# Altium PCB PCB1.PcbDoc
Units mm, origin at the board's own origin, x right, y up, seen from the top; angles counter-clockwise.
Board outline 60 x 50 mm, 2 copper layers (Top Layer, Bottom Layer); 26 components, 10 nets, 126 pads, 76 vias.
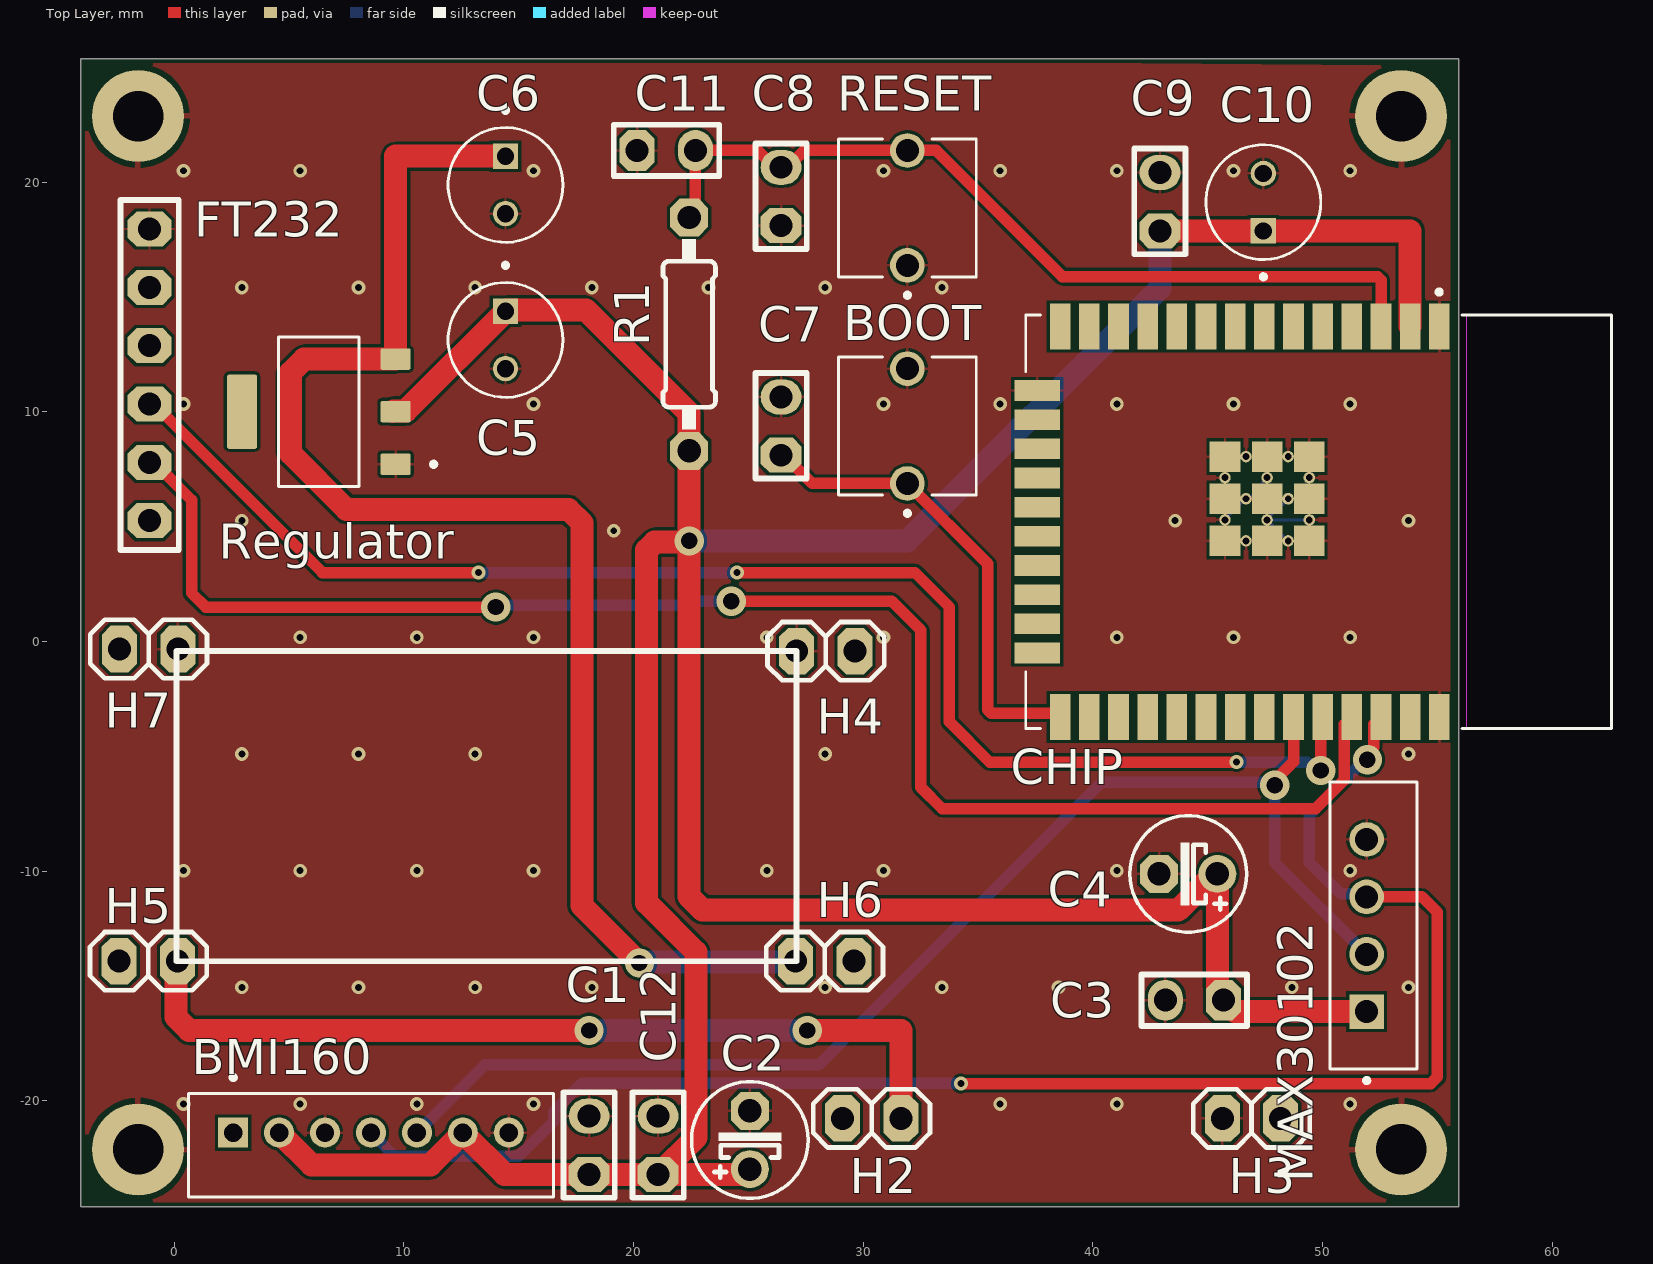
[diagram p0: Top Layer view]
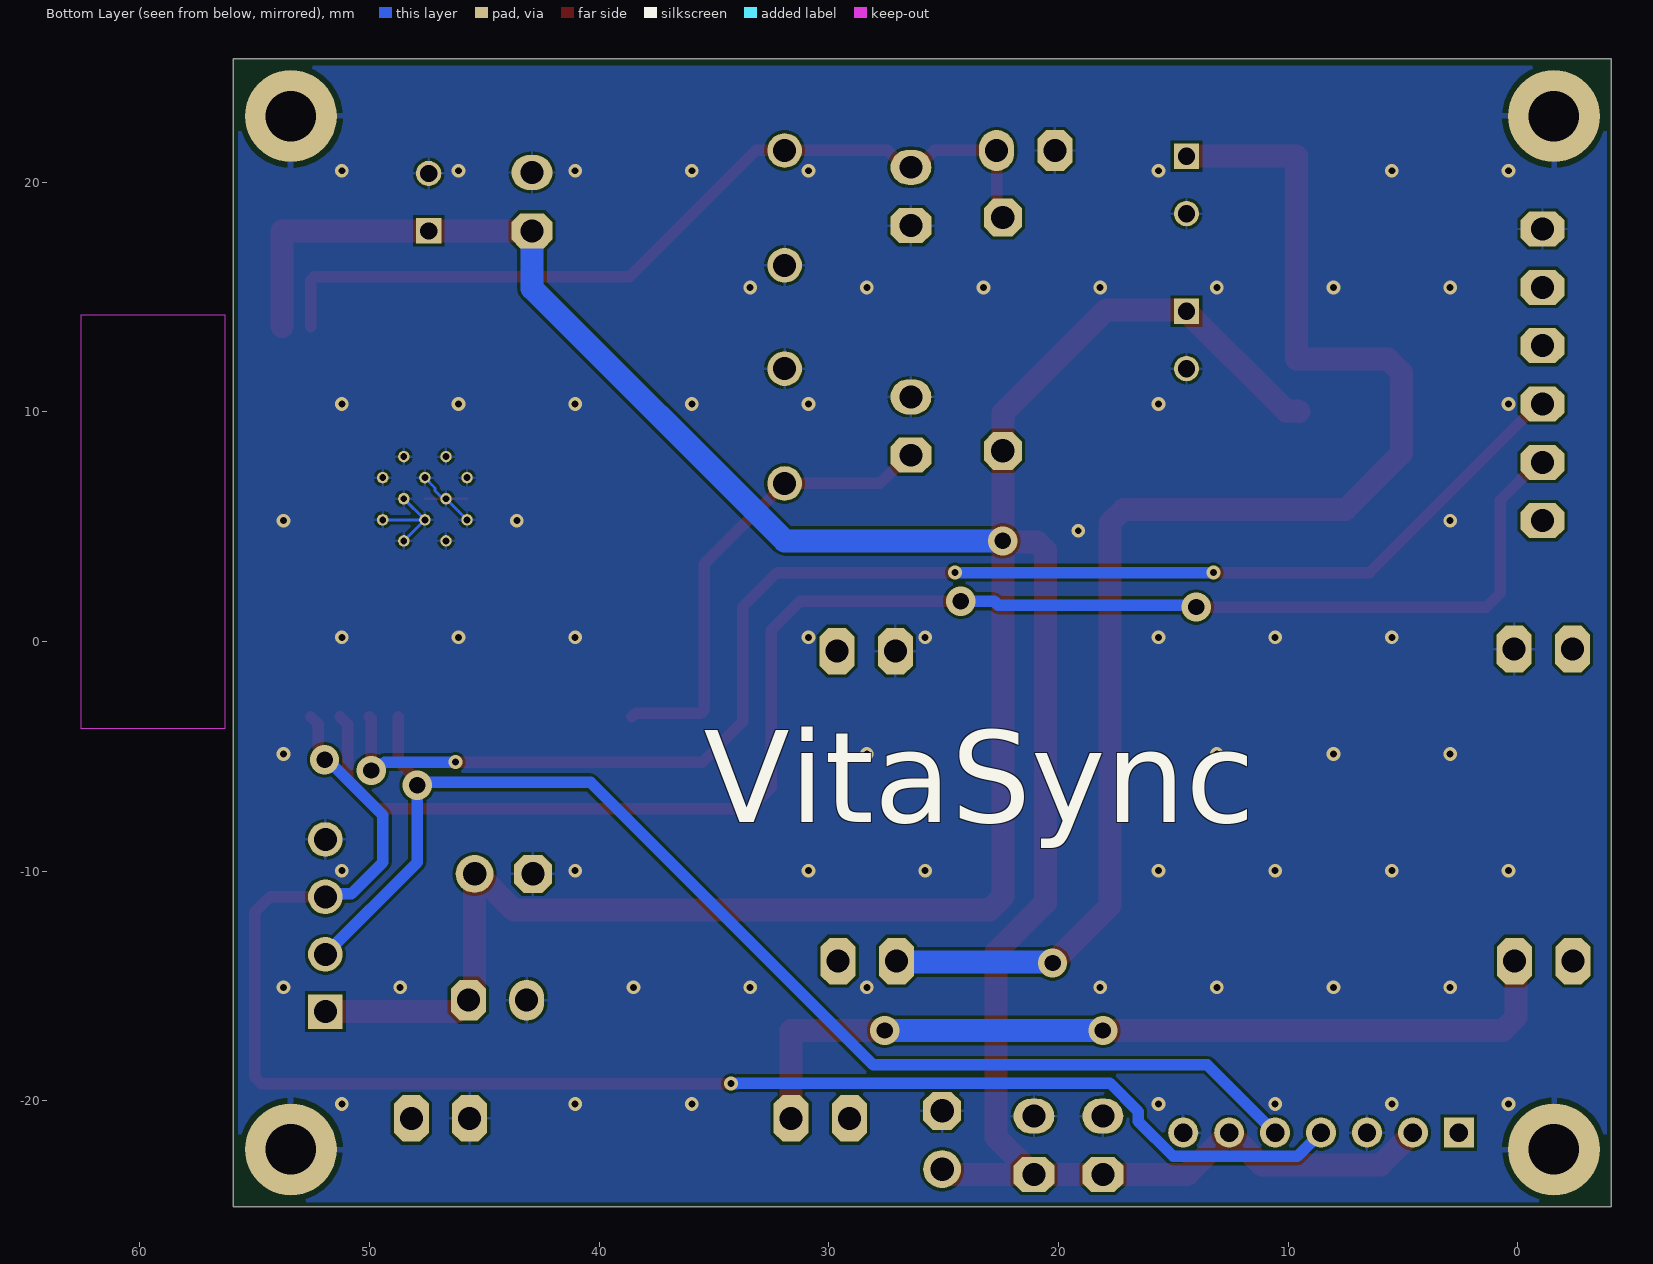
[diagram p1: Bottom Layer view, seen from below]
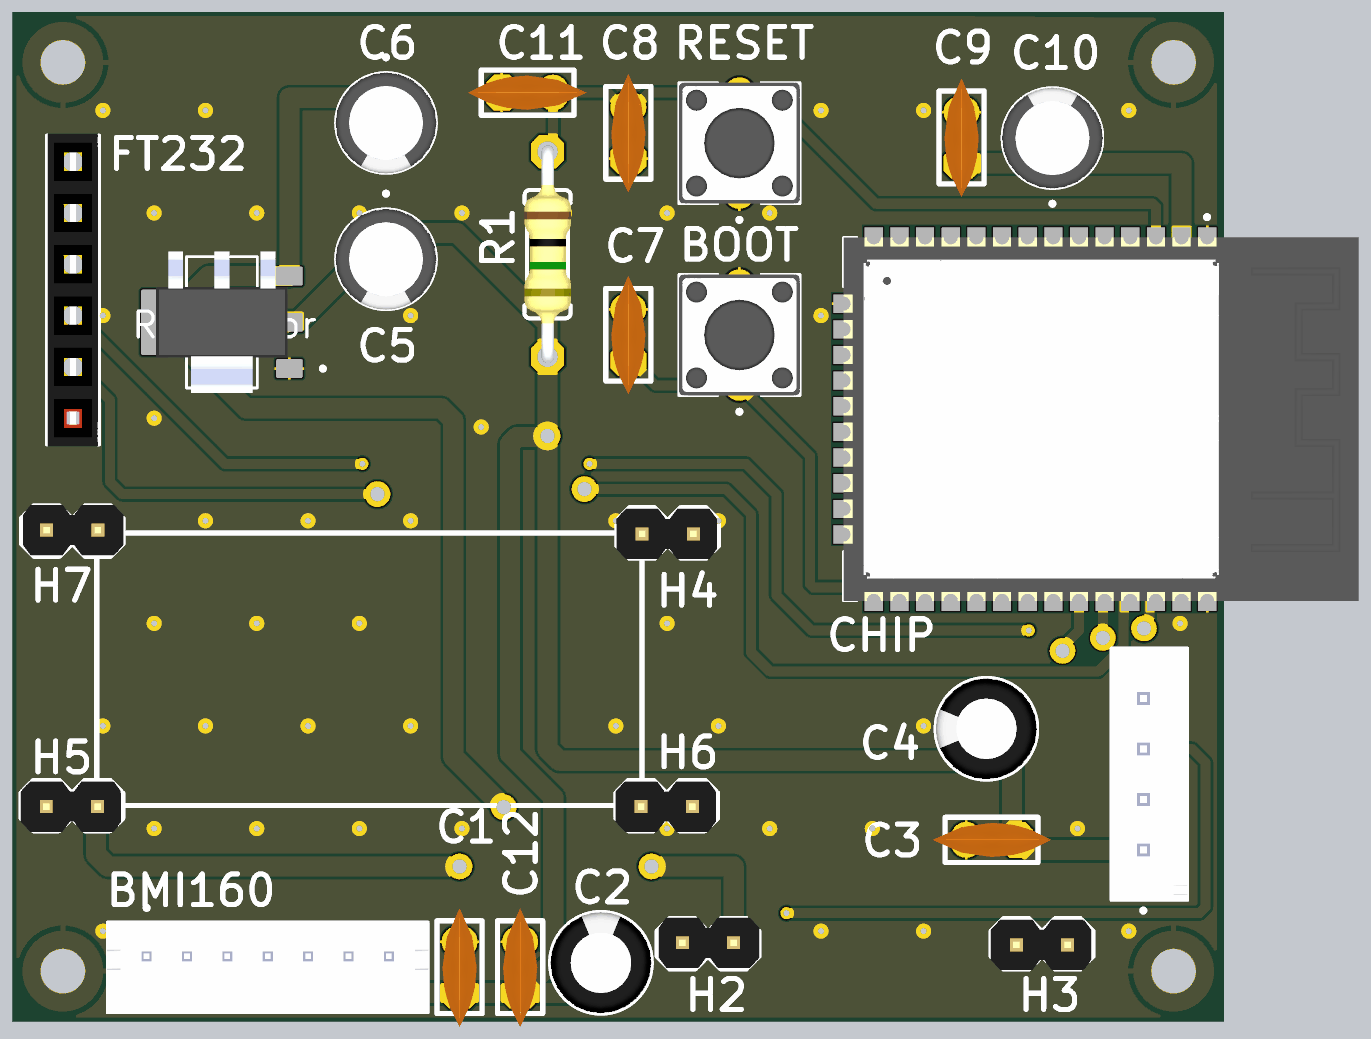
[diagram p2: 3D render of the assembled board from above, using the file's embedded part models]

## Layer stack, top to bottom
Top Solder: solder mask 0.0102, Solder Resist, Dk 3.5
Top Layer: signal copper 0.0356
Dielectric 1: dielectric 0.32, FR-4, Dk 4.8
Bottom Layer: signal copper 0.0356
Bottom Solder: solder mask 0.0102, Solder Resist, Dk 3.5

## Board outline
-4.08,-24.619 55.92,-24.619 55.92,25.381 -4.08,25.381

## Design rules (kind name [scope] priority, off if disabled: settings)
BoardOutlineClearance [All] p1: gap=0.2 ignorepadtopadclearanceinfootprint=FALSE
Clearance [All] p1: gap=0.127 ignorepadtopadclearanceinfootprint=FALSE except(0.25: Arc-Hole Track-Hole SMDPad-Hole THPad-Hole Via-Hole Fill-Hole Poly-Hole Region-Hole Text-Hole)
ComponentClearance [All] p1: gap=0.127 collisioncheckmode=3 verticalgap=0.127 showdistances=TRUE
DiffPairsRouting [All] p1: maxlimit=0.254 minlimit=0.127 mostfreqgap=0.127 toplayer_minwidth=0.127 toplayer_maxwidth=25.4 toplayer_prefwidth=0.127 bottomlayer_minwidth=0.127 bottomlayer_maxwidth=25.4 bottomlayer_prefwidth=0.127 maxuncoupledlength=12.7
Height [All] p1: minheight=0 maxheight=1816.048 prefheight=12.7
HoleSize [All] p1: absolutevalues=TRUE maxlimit=6.3 minlimit=0.3 maxpercent=80.000 minpercent=20.000
HoleToHoleClearance [All] p1: gap=0.25 allowstackedmicrovias=FALSE
MinimumAnnularRing [All] p1: minimumring=0.076
MinimumSolderMaskSliver [All] p1: minsoldermaskwidth=0
PlaneClearance [All] p1: clearance=0.127
PlaneConnect PlaneConnectPowerPads [InPadClass('PowerPads')] p1: planeconnectstyle=Direct reliefexpansion=0.508 reliefentries=4 reliefconductorwidth=0.254 reliefairgap=0.254
PlaneConnect [All] p2: pad.planeconnectstyle=Relief pad.reliefexpansion=0.3 pad.reliefentries=4 pad.reliefconductorwidth=0.127 pad.reliefairgap=0.127 via.planeconnectstyle=Direct via.reliefexpansion=0.3 via.reliefentries=4 via.reliefconductorwidth=0.127 via.reliefairgap=0.127
PolygonConnect PolygonConnectPowerPads [All vs (InPadClass('PowerPads'))] p1: connectstyle=Direct reliefconductorwidth=0.254 reliefentries=4 polygonreliefangle="90 Angle" airgapwidth=0.254
PolygonConnect [All] p2: thpad.connectstyle=Relief thpad.reliefconductorwidth=0.127 thpad.reliefentries=4 thpad.polygonreliefangle="90 Angle" thpad.airgapwidth=0.127 smdpad.connectstyle=Relief smdpad.reliefconductorwidth=0.127 smdpad.reliefentries=4 smdpad.polygonreliefangle="90 Angle" smdpad.airgapwidth=0.127 via.connectstyle=Direct via.reliefconductorwidth=0.127 via.reliefentries=4 via.polygonreliefangle="90 Angle" via.airgapwidth=0.127
RoutingVias [All] p1: holewidth=0.3 width=0.6 viastyle="Through Hole" minholewidth=0.3 minwidth=0.6 maxholewidth=0.6 maxwidth=6.6
SilkToSilkClearance [All] p1: silktosilkclearance=0
SilkToSolderMaskClearance [IsPad] p1: minsilkscreentomaskgap=0.127 clearancetoexposedcopper=TRUE
SolderMaskExpansion [All] p1: expansion=0.075 istentingtop=FALSE
Width [All] p1: maxlimit=25.4 minlimit=0.127 preferedwidth=0.127 minimp=50.000000 maximp=50.000000 favimp=50.000000
20 further rules are at their usual default settings.

## Components (designator, comment, footprint, x,y, rotation, side; value= is the part's Value field where it differs from the comment)
BMI160 "JST_7" JST_7 8.563,-21.936 r180 top
BOOT "" SW_BUTT-2 31.92,9.381 r90 top
C1 "Ceramic Capacitor" "Ceramic Capacitor" 18.063,-21.936 r90 top
C2 "Capacitor 10uF" "Capacitor 10uF" 24.892,-21.866 r90 top
C3 "Ceramic Capacitor" "Ceramic Capacitor" 44.42,-15.619 r180 top
C4 "Capacitor 10uF" "Capacitor 10uF" 44.31,-10.291 r180 top
C5 "EEUHD1H220" CAPPRD250W50D500H1100 14.42,13.131 r270 top
C6 "EEUHD1H220" CAPPRD250W50D500H1100 14.42,19.881 r270 top
C7 "Ceramic Capacitor" "Ceramic Capacitor" 26.42,9.381 r90 top
C8 "Ceramic Capacitor" "Ceramic Capacitor" 26.42,19.381 r90 top
C9 "Ceramic Capacitor" "Ceramic Capacitor" 42.92,19.151 r90 top
C10 "EEUHD1H220" CAPPRD250W50D500H1100 47.42,19.131 r90 top
C11 "Ceramic Capacitor" "Ceramic Capacitor" 21.42,21.381 r0 top
C12 "Ceramic Capacitor" "Ceramic Capacitor" 21.063,-21.936 r90 top
CHIP "ESP32 Wroom 32D" "ESP32 Wroom 32D" 48.428,5.47 r270 top
FT232 "FEMALE_HEADER_6" FEMALE_HEADER_6 -1.08,11.611 r90 top
H2 "Header_2" HEADER_2 30.483,-20.936 r180 top
H3 "Header_2" HEADER_2 46.787,-20.594 r0 top
H4 "Header_2" HEADER_2 28.25,-0.25 r0 top
H5 "Header_2" HEADER_2 -1.25,-13.75 r0 top
H6 "Header_2" HEADER_2 28.2,-13.75 r0 top
H7 "Header_2" HEADER_2 -1,-0.5 r180 top
MAX30102 "JST_4" JST_4 51.92,-12.369 r90 top
R1 "resistor" Resistor 22.42,13.381 r270 top
Regulator "ASM1117" ASM1117 6.42,9.881 r180 top
RESET "BUTT-2" SW_BUTT-2 31.92,18.881 r90 top

## Footprints (in the part's own frame and the unit in brackets; to place one, negate y for a bottom-side part, rotate by r counter-clockwise, add the part's x,y. Pads: shape width x height; smd on the part's side, far side on the other; paste and mask are expansions set on the pad)
ASM1117 [mm]
  rrect15% 1.31x0.93 smd: 1(-3.218,2.163) 2(-3.218,-0.127) 3(-3.218,-2.417)
  rrect15% 1.31x3.24 smd: 4(3.472,-0.127)
  silkscreen extent -4.97,-3.38 1.88,3.13, body extent -3.12,-3.63 3.38,3.37, height 1.8
"Capacitor 10uF" [mil]
  round 65 hole 40: +(-43.7,-6.73)
  oct 65x65 hole 40: -(56.3,-6.73)
  silkscreen extent -94,-107 106,93, body extent -92,-105 104,92, height 395
CAPPRD250W50D500H1100 [mm]
  round 1.1 hole 0.75: N(1.25,0)
  rect 1.1x1.1 hole 0.75: P(-1.25,0)
  silkscreen extent -3.35,-2.5 2.5,2.5, body extent -2.5,-2.5 2.5,2.5, height 11
"Ceramic Capacitor" [mil]
  oct 60x70 hole 39.37: 1(-50,0)
  oval 60x70 hole 39.37: 2(50,0)
  silkscreen extent -90,-44 91,44, body extent -115,-33 115,33, height 245
"ESP32 Wroom 32D" [mm]
  rect 2x0.9 smd: 1(-8.246,6.657) 2(-8.246,5.387) 3(-8.246,4.117) 4(-8.246,2.847) 5(-8.246,1.577) 6(-8.246,0.307) 7(-8.246,-0.963) 8(-8.246,-2.233) 9(-8.246,-3.503) 10(-8.246,-4.773) 11(-8.246,-6.043) 12(-8.246,-7.313) 13(-8.246,-8.583) 14(-8.246,-9.853) 25(8.754,-9.853) 26(8.754,-8.583) 27(8.754,-7.313) 28(8.754,-6.043) 29(8.754,-4.773) 30(8.754,-3.503) 31(8.754,-2.233) 32(8.754,-0.963) 33(8.754,0.307) 34(8.754,1.577) 35(8.754,2.847) 36(8.754,4.117) 37(8.754,5.387) 38(8.754,6.657)
  rect 0.9x2 smd: 15(-5.461,-10.853) 16(-4.191,-10.853) 17(-2.921,-10.853) 18(-1.651,-10.853) 19(-0.381,-10.853) 20(0.889,-10.853) 21(2.159,-10.853) 22(3.429,-10.853) 23(4.699,-10.853) 24(5.969,-10.853)
  rect 1.33x1.33 smd: 39_1(-2.581,0.992) 39_2(-0.746,0.992) 39_3(1.089,0.992) 39_4(-2.581,-0.843) 39_5(-0.746,-0.843) 39_6(1.089,-0.843) 39_7(-2.581,-2.678) 39_8(-0.746,-2.678) 39_9(1.089,-2.678)
  round 0.5 hole 0.3: 39_10(-1.663,0.992) 39_11(0.172,0.992) 39_12(-2.581,0.075) 39_13(-0.746,0.075) 39_14(1.089,0.075) 39_15(-1.663,-0.843) 39_16(0.172,-0.843) 39_17(-2.581,-1.76) 39_18(-0.746,-1.76) 39_19(1.089,-1.76) 39_20(-1.663,-2.678) 39_21(0.172,-2.678)
  Keep-Out Layer region: 9.254,7.847 -8.746,7.847 -8.746,14.147 9.254,14.147
  silkscreen extent -9.85,-11.35 9.25,14.15, body extent -8.75,-11.35 9.25,14.15, height 3.25
FEMALE_HEADER_6 [mm]
  oct 1.524x1.905 hole 1: 1(-6.35,0) 2(-3.81,0) 3(-1.27,0) 4(1.27,0) 5(3.81,0) 6(6.35,0)
  silkscreen extent -7.62,-1.27 7.62,1.27, body extent -7.74,-1.25 7.75,1.25, height 8.5
HEADER_2 [mil]
  oct 60x80 hole 39.37: 1(-45.35,-6.73) 2(54.65,-6.73)
  silkscreen extent -95,-57 105,43, body extent -95,-58 101,40, height 323
JST_4 [mm]
  rect 1.508x1.508 / inner round 1.508 / far side rect 1.508x1.508 hole 1: 1(-3.75,0)
  round 1.508 hole 1: 2(-1.25,0) 3(1.25,0) 4(3.75,0)
  silkscreen extent -6.85,-2.2 6.25,1.6, body extent -6.25,-2.2 6.25,1.6, height 6
JST_7 [mm]
  rect 1.308x1.308 / inner round 1.308 / far side rect 1.308x1.308 hole 0.8: 1(6,-0.55)
  round 1.308 hole 0.8: 2(4,-0.55) 3(2,-0.55) 4(0,-0.55) 5(-2,-0.55) 6(-4,-0.55) 7(-6,-0.55)
  silkscreen extent -7.95,-3.05 7.95,2.25, body extent -7.95,-2.25 7.95,2.25, height 6
Resistor [mil] "10K, 0.25 W"
  oct 65x65 hole 40: 1(-200,0) 2(200,0)
  silkscreen extent -163,-45 163,45, body extent -212,-45 212,46, height 96
SW_BUTT-2 [mm]
  round 1.508 hole 1 mask+0.102: 1(-2.5,0) 2(2.5,0)
  silkscreen extent -3.9,-3 3,3, body extent -3,-3 3,3, height 5.1

## Part data
BOOT: library part BUTT-2, "Tactile Switches MINI PUSH BUTTON SWITCH 2-PIN QTY. 4", Package=None, Check_prices=https://www.snapeda.com/parts/BUTT-2/Gravitech/view-part/?ref=eda, MF=Gravitech, MP=BUTT-2, SnapEDA_Link=https://www.snapeda.com/parts/BUTT-2/Gravitech/view-part/?ref=snap
C5 C6 C10: "Cap Aluminum Lytic 22uF 50V 20% (5 X 11mm) Radial 2.5mm 65mA 1000h 105C Bulk", Package="RADIAL-2 Panasonic", Availability="In Stock", Check_prices=https://www.snapeda.com/parts/EEU-HD1H220/Panasonic/view-part/?ref=eda, MF=Panasonic, MP=EEU-HD1H220, Price=None, Purchase-URL=https://pricing.snapeda.com/search/part/EEU-HD1H220/?ref=eda, SnapEDA_Link=https://www.snapeda.com/parts/EEU-HD1H220/Panasonic/view-part/?ref=snap
C12: "10uF"
R1: "10k,0.25W"
RESET: "Tactile Switches MINI PUSH BUTTON SWITCH 2-PIN QTY. 4", Package=None, Check_prices=https://www.snapeda.com/parts/BUTT-2/Gravitech/view-part/?ref=eda, MF=Gravitech, MP=BUTT-2, SnapEDA_Link=https://www.snapeda.com/parts/BUTT-2/Gravitech/view-part/?ref=snap

## Free pads (board coordinates)
  round 4 hole 2.2 paste-2539.97 mask+0.102: MH1(-1.58,-22.119) MH2(53.42,-22.119) MH4(53.42,22.881) MH5(-1.58,22.881)

## Via types
v1: diameter 0.6, hole 0.3, Top Layer to Bottom Layer, 67 vias
v2: diameter 1.27, hole 0.711, Top Layer to Bottom Layer, 9 vias

## Nets (pads, with @x,y where several pads share a name; then routed paths per layer and width w, separated by ;. In a path a pad name is that pad's centre, name@x,y a point inside that pad or via, vN(x,y) a via of type N, cw(c..) or ccw(c..) an arc to the next point about the centre after c; other vN are vias at no path point)
+4.7: H2.1 H5.2 | length 38.1
  Top Layer w1: H5.2@0.063,-13.936 0.063,-16.351 0.649,-16.936 v2(18.063,-16.936) ; v2(27.563,-16.936) 31.635,-16.936 H2.1
  Bottom Layer w1: v2(18.063,-16.936) v2(27.563,-16.936)
+5: C6.P H6.1 Regulator.3 | length 62.9
  Top Layer w1: C6.P 9.638,21.131 Regulator.3 5.649,12.298 5.063,11.712 5.063,8.187 7.5,5.75 17.164,5.75 17.75,5.164 17.75,-11.5 v2(20.25,-14)
  Bottom Layer w1: v2(20.25,-14) 20.289,-13.961 27.039,-13.961 H6.1@27.063,-13.936
EN: C8.2 C11.2 CHIP.3 R1.1 RESET.2 | length 37.8
  Top Layer w0.5: R1.1 22.69,18.731 C11.2 25.407,21.381 26.137,20.651 C8.2 26.704,20.651 27.434,21.381 RESET.2 33.175,21.381 38.675,15.881 52.397,15.881 52.545,15.732 CHIP.3
GND: BMI160.3 BMI160.7 BOOT.2 C1.2 C2.- C3.2 C4.- C5.N C6.N C7.2 C8.1 C9.2 C10.N C11.1 C12.2 CHIP.1 CHIP.15 CHIP.38 CHIP.39_1 CHIP.39_2 CHIP.39_3 CHIP.39_4 CHIP.39_5 CHIP.39_6 CHIP.39_7 CHIP.39_8 CHIP.39_9 CHIP.39_10 CHIP.39_11 CHIP.39_12 CHIP.39_13 CHIP.39_14 CHIP.39_15 CHIP.39_16 CHIP.39_17 CHIP.39_18 CHIP.39_19 CHIP.39_20 CHIP.39_21 FT232.6 H3.1 H4.1 H7.1 MAX30102.4 pad.MH1 pad.MH2 pad.MH4 pad.MH5 Regulator.1 RESET.1 | length 9
  Top Layer w0.127: CHIP.39_8 CHIP.39_5
  Bottom Layer w0.127: CHIP.39_21 CHIP.39_18 46.731,6.152 47.142,6.562 47.142,6.689 CHIP.39_15 ; CHIP.39_14 CHIP.39_16 ; CHIP.39_13 CHIP.39_16 ; CHIP.39_11 CHIP.39_16
  other v1: 0.4,-20.139 5.48,-20.139 10.56,-20.139 15.64,-20.139 35.96,-20.139 41.04,-20.139 51.2,-20.139 2.94,-15.059 8.02,-15.059 13.1,-15.059 18.18,-15.059 28.34,-15.059 33.42,-15.059 38.5,-15.059 48.66,-15.059 53.74,-15.059 0.4,-9.979 5.48,-9.979 10.56,-9.979 15.64,-9.979 25.8,-9.979 30.88,-9.979 41.04,-9.979 51.2,-9.979 2.94,-4.899 8.02,-4.899 13.1,-4.899 28.34,-4.899 53.74,-4.899 5.48,0.181 10.56,0.181 15.64,0.181 25.8,0.181 30.88,0.181 41.04,0.181 46.12,0.181 51.2,0.181 19.135,4.824 2.94,5.261 43.58,5.261 53.74,5.261 0.4,10.341 15.64,10.341 30.88,10.341 35.96,10.341 41.04,10.341 46.12,10.341 51.2,10.341 2.94,15.421 8.02,15.421 13.1,15.421 18.18,15.421 23.26,15.421 28.34,15.421 33.42,15.421 0.4,20.501 5.48,20.501 15.64,20.501 30.88,20.501 35.96,20.501 41.04,20.501 46.12,20.501 51.2,20.501
NetBOOT_1: BOOT.1 C7.1 CHIP.25 | length 20.6
  Top Layer w0.5: C7.1 26.547,8.111 27.777,6.881 BOOT.1 35.42,3.381 35.42,-2.971 35.569,-3.119 38.41,-3.119 CHIP.25
NetCHIP_34: CHIP.34 FT232.3 | length 62.9
  Top Layer w0.5: FT232.3 -0.889,10.341 6.451,3 v1(13.25,3) ; v1(24.5,3) 32.25,3 33.75,1.5 33.75,-3.5 35.5,-5.25 v1(46.25,-5.25) ; v2(49.92,-5.619) 49.92,-3.369 CHIP.34
  Bottom Layer w0.5: v1(13.25,3) v1(24.5,3) ; v1(46.25,-5.25) 49.343,-5.25 49.712,-5.619 v2(49.92,-5.619)
NetCHIP_35: CHIP.35 FT232.2 | length 68.3
  Top Layer w0.5: FT232.2 -0.889,7.801 0.75,6.161 0.75,2.114 1.364,1.5 v2(14,1.5) ; v2(24.25,1.75) 31.25,1.75 32.5,0.5 32.5,-6.343 33.431,-7.274 49.703,-7.274 50.936,-6.04 50.936,-5.199 50.935,-5.197 50.935,-4.686 50.952,-4.669 50.952,-3.608 CHIP.35
  Bottom Layer w0.5: v2(14,1.5) 14.076,1.576 22.615,1.576 22.789,1.75 v2(24.25,1.75)
SCL: BMI160.4 CHIP.36 MAX30102.3 | length 69.9
  Top Layer w0.5: v1(34.25,-19.25) 54.707,-19.25 55,-18.957 55,-11.793 54.327,-11.119 MAX30102.3 ; v2(51.951,-5.149) 51.951,-4.874 52.222,-4.603 52.222,-3.608 CHIP.36
  Bottom Layer w0.5: BMI160.4 9.598,-22.421 14.992,-22.421 16.517,-20.897 16.517,-20.469 17.757,-19.23 34,-19.23 34.02,-19.25 v1(34.25,-19.25) ; MAX30102.3 51.785,-10.984 50.785,-10.984 49.42,-9.619 49.42,-7.556 51.828,-5.149 v2(51.951,-5.149)
SDA: BMI160.5 CHIP.33 MAX30102.2 | length 56.1
  Top Layer w0.5: v2(47.92,-6.262) 47.92,-6.054 48.735,-5.239 CHIP.33
  Bottom Layer w0.5: BMI160.5 13.514,-18.436 28.063,-18.436 40.368,-6.131 47.79,-6.131 v2(47.92,-6.262) 47.92,-9.619 MAX30102.2
VDD33: BMI160.2 BMI160.6 C1.1 C2.+ C3.1 C4.+ C5.P C9.1 C10.P C12.1 CHIP.2 MAX30102.1 R1.2 Regulator.2 | length 169.5
  Top Layer w1: BMI160.2 4.572,-21.386 5.98,-22.794 11.147,-22.794 12.555,-21.386 BMI160.6 14.383,-23.206 C1.1 C12.1 ; Regulator.2@9.518,10.008 9.553,10.043 10.082,10.043 14.47,14.431 17.93,14.431 22.42,9.941 v2(22.42,4.381) ; C2.+ 24.887,-22.976 24.657,-23.206 C12.1 ; C9.1 C10.P 53.815,17.881 CHIP.2 ; MAX30102.1 46.19,-16.119 45.991,-15.92 45.952,-15.92 45.69,-15.658 C3.1 cw(c46.342,-14.968) 45.42,-14.968 C4.+ 45.291,-10.119 43.711,-11.699 23.006,-11.699 22.42,-11.113 v2(22.42,4.381) ; C12.1 21.102,-23.206 22.707,-21.602 22.707,-13.521 20.563,-11.378 20.563,3.978 20.915,4.329 22.369,4.329 v2(22.42,4.381)
  Bottom Layer w1: v2(22.42,4.381) 31.92,4.381 42.92,15.381 C9.1
pads on no net: BMI160.1 CHIP.4 CHIP.5 CHIP.6 CHIP.7 CHIP.8 CHIP.9 CHIP.10 CHIP.11 CHIP.12 CHIP.13 CHIP.14 CHIP.16 CHIP.17 CHIP.18 CHIP.19 CHIP.20 CHIP.21 CHIP.22 CHIP.23 CHIP.24 CHIP.26 CHIP.27 CHIP.28 CHIP.29 CHIP.30 CHIP.31 CHIP.32 CHIP.37 FT232.1 FT232.4 FT232.5 H2.2 H3.2 H4.2 H5.1 H6.2 H7.2 Regulator.4

## Polygon pours and split planes (outlines as drawn)
GND on Bottom Layer "GND_L02_P001" (solid, remove dead copper, pour order 1): -4.437,25.564 -3.937,25.064 56.063,25.064 56.063,-24.436 -3.937,-24.436
GND on Top Layer "GND_L01_P000" (solid, remove dead copper, pour order 0): 55.563,25.064 55.563,-23.936 56.246,-24.619 -3.937,-24.619 -3.937,25.564

## Silkscreen, mask and mechanical layers (free items; w line width, h text height)
Top Overlay:
  lines w0.051: 27,-13.873 27.063,-13.936
  lines w0.254: 0.098,-13.921 27.098,-13.921 27.098,-0.421 0.098,-0.421 0.098,-13.921
Bottom Overlay:
  text "VitaSync" at 35.45,-7.867 h4

## Text inside footprints (layer, text, board x,y; h text height)
CHIP: Mechanical 13 "ANTENNA" at 58.825,11.216 h1.78 r270